# EAGLE board nano_control_station (EAGLE 7.4.0)
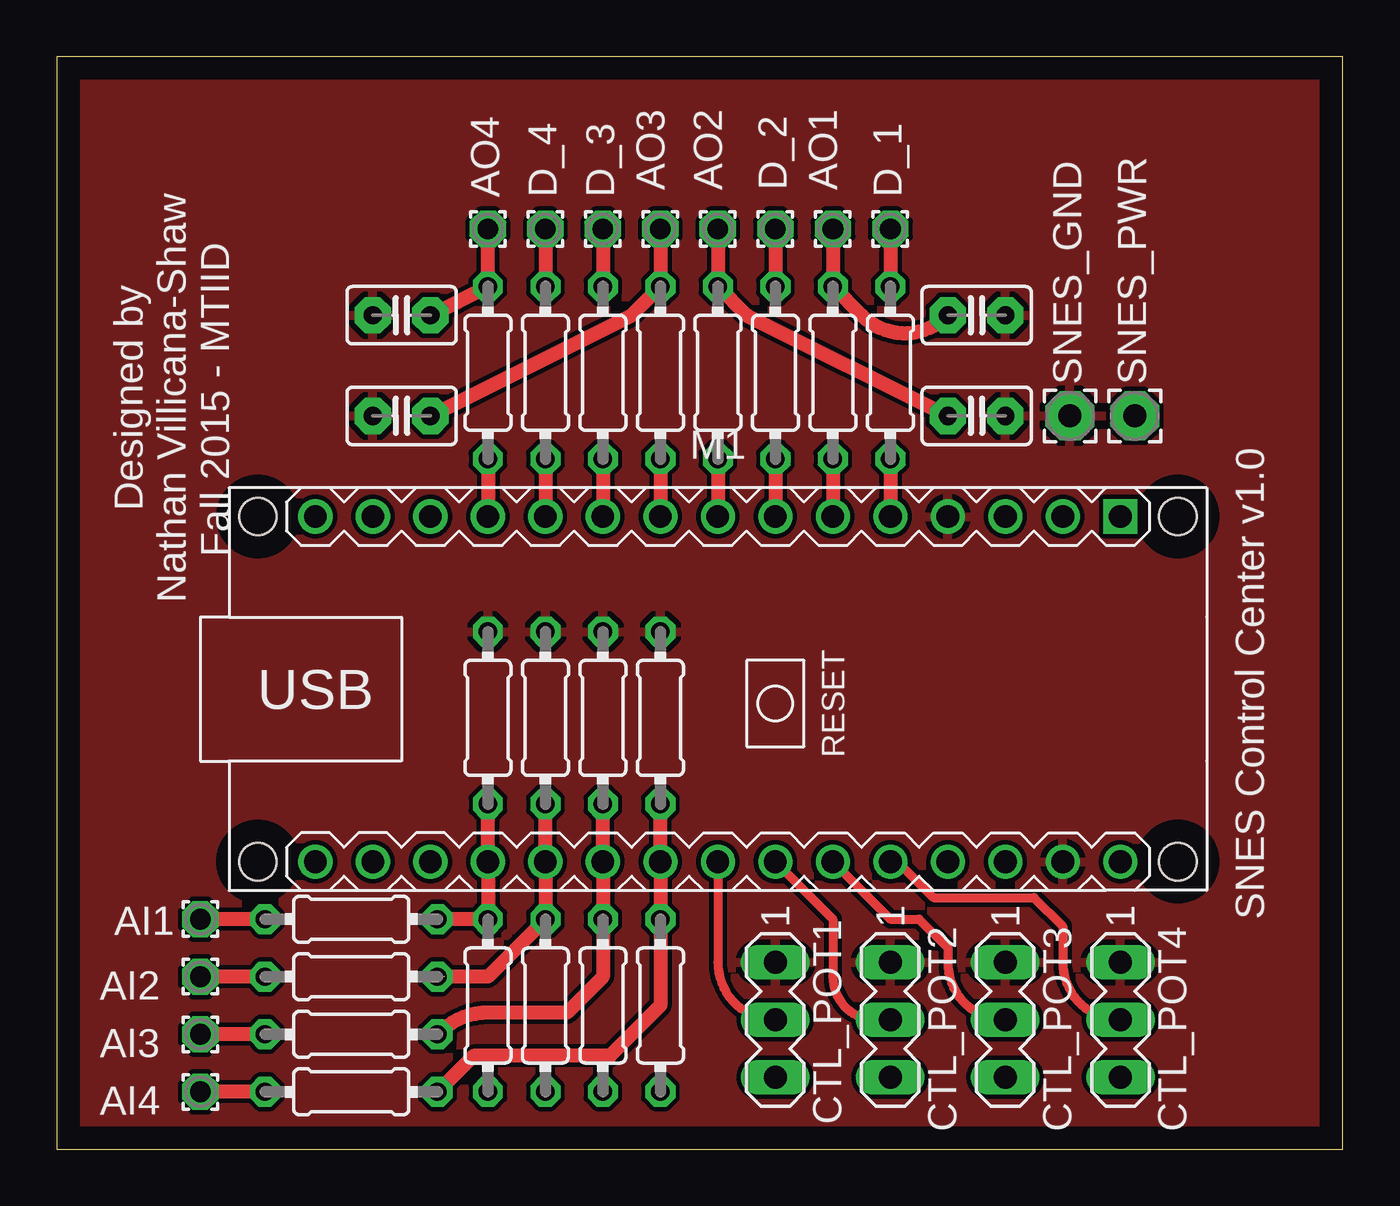
[diagram p0: board, top side]
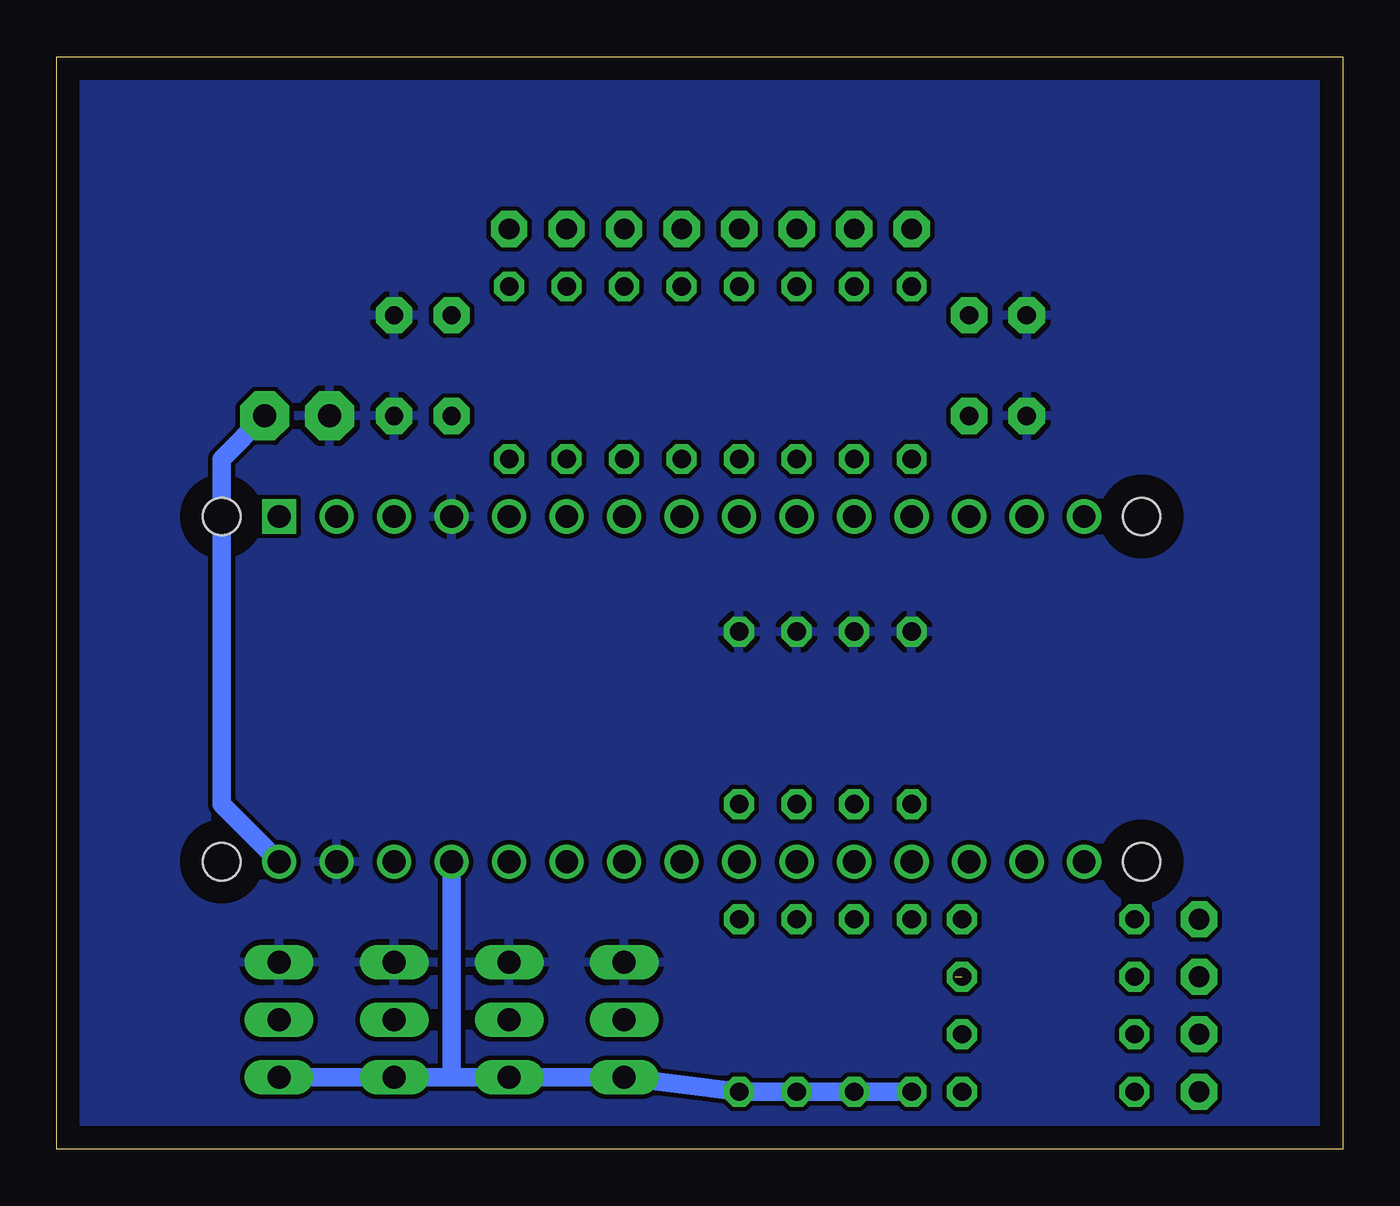
[diagram p1: board, bottom side, seen from below]

Size 56.82 x 48.25 mm. Coordinates in mm from the lower left corner, seen from the top.
Outline: 0,0 56.82,0 56.82,48.25 0,48.25 0,0
Copper layers (1*16): Top 0.035mm / dielectric 1.5mm / Bottom 0.035mm
Design rules "default": minimum track width 10mil, minimum drill 24mil, track to track 8mil, track to pad 8mil, pad to pad 8mil, via to via 8mil, smd to smd 8mil, copper to edge 40mil, drill to drill 8mil, minimum pad ring 10mil, minimum via ring 8mil, stop-mask expansion 4mil, vias tented up to drill 0mil, thermal gap 10mil

## Footprints (pad centres in the part's own frame; a part is rotated, then mirrored left to right if it is on the bottom)
1,6/0,9 = drill 0.914 pad 1.6 octagon: 1 0,0
C2.5-2 = drill 0.813 pad 1.6 octagon: 1 -1.27,0; 2 1.27,0
MA03-1 = drill 1.016 long: 1 -2.54,0; 2 0,0; 3 2.54,0
ARDUINO-NANO-3.0 = drill 1 square: J1.1 17.78,7.62 | drill 1: J1.2 15.24,7.62; J1.3 12.7,7.62; J1.4 10.16,7.62; J1.5 7.62,7.62; J1.6 5.08,7.62; J1.7 2.54,7.62; J1.8 0,7.62; J1.9 -2.54,7.62; J1.10 -5.08,7.62; J1.11 -7.62,7.62; J1.12 -10.16,7.62; J1.13 -12.7,7.62; J1.14 -15.24,7.62; J1.15 -17.78,7.62; J2.1 17.78,-7.62; J2.2 15.24,-7.62; J2.3 12.7,-7.62; J2.4 10.16,-7.62; J2.5 7.62,-7.62; J2.6 5.08,-7.62; J2.7 2.54,-7.62; J2.8 0,-7.62; J2.9 -2.54,-7.62; J2.10 -5.08,-7.62; J2.11 -7.62,-7.62; J2.12 -10.16,-7.62; J2.13 -12.7,-7.62; J2.14 -15.24,-7.62; J2.15 -17.78,-7.62 | hole 1.651: -20.32,7.62; -20.32,-7.62; 20.32,-7.62; 20.32,7.62
0204/7 = drill 0.813 octagon: 1 -3.81,0; 2 3.81,0
2,15/1,0 = drill 1.016 pad 2.159 octagon: 1 0,0

## Placement (x,y rotation side)
AI1  WIREPAD1,6/0,9  [1,6/0,9]  6.35,10.16 90 top
AI2  WIREPAD1,6/0,9  [1,6/0,9]  6.35,7.62 90 top
AI3  WIREPAD1,6/0,9  [1,6/0,9]  6.35,5.08 90 top
AI4  WIREPAD1,6/0,9  [1,6/0,9]  6.35,2.54 0 top
AO1  WIREPAD1,6/0,9  [1,6/0,9]  34.29,40.64 0 top
AO2  WIREPAD1,6/0,9  [1,6/0,9]  29.21,40.64 0 top
AO3  WIREPAD1,6/0,9  [1,6/0,9]  26.67,40.64 0 top
AO4  WIREPAD1,6/0,9  [1,6/0,9]  19.05,40.64 0 top
C1  0.1uf  [C2.5-2]  40.64,36.83 0 top
C2  0.1uf  [C2.5-2]  40.64,32.38 0 top
C3  0.1uf  [C2.5-2]  15.24,32.38 180 top
C4  0.1uf  [C2.5-2]  15.24,36.83 180 top
CTL_POT1  [MA03-1]  31.75,5.71 270 top
CTL_POT2  [MA03-1]  36.83,5.71 270 top
CTL_POT3  [MA03-1]  41.91,5.71 270 top
CTL_POT4  [MA03-1]  46.99,5.71 270 top
D_1  WIREPAD1,6/0,9  [1,6/0,9]  36.83,40.64 0 top
D_2  WIREPAD1,6/0,9  [1,6/0,9]  31.75,40.64 0 top
D_3  WIREPAD1,6/0,9  [1,6/0,9]  24.13,40.64 0 top
D_4  WIREPAD1,6/0,9  [1,6/0,9]  21.59,40.64 0 top
M1  ARDUINO-NANO-3.0  [ARDUINO-NANO-3.0]  29.21,20.32 0 top
R1  3.9k  [0204/7]  34.29,34.29 90 top
R2  3.9k  [0204/7]  29.21,34.29 90 top
R3  3.9k  [0204/7]  26.67,34.29 90 top
R4  3.9k  [0204/7]  19.05,34.29 90 top
R5  200  [0204/7]  13.02,10.16 0 top
R6  60  [0204/7]  19.05,6.35 270 top
R7  90  [0204/7]  19.05,19.05 270 top
R8  200  [0204/7]  13.02,5.08 0 top
R9  60  [0204/7]  24.13,6.35 270 top
R10  90  [0204/7]  24.13,19.05 270 top
R11  200  [0204/7]  13.02,7.62 0 top
R12  60  [0204/7]  21.59,6.35 270 top
R13  90  [0204/7]  21.59,19.05 270 top
R14  200  [0204/7]  13.02,2.54 0 top
R15  60  [0204/7]  26.67,6.35 270 top
R16  90  [0204/7]  26.67,19.05 270 top
R17  15  [0204/7]  36.83,34.29 90 top
R18  15  [0204/7]  31.75,34.29 90 top
R19  15  [0204/7]  24.13,34.29 90 top
R20  15  [0204/7]  21.59,34.29 90 top
SNES_GND  [2,15/1,0]  44.77,32.38 0 top
SNES_PWR  [2,15/1,0]  47.62,32.38 0 top

## Library data of the parts
AI1-AI4 AO1-AO4 D_1-D_4 SNES_GND SNES_PWR = wirepad
C1-C4 = capacitor-wima
CTL_POT1-CTL_POT4 = con-lstb; OC_FARNELL: unknown; OC_NEWARK: unknown
M1 = diy-modules
R1-R20 = rcl

## Nets
3V3: M1.J2.14
5V: CTL_POT1.3 CTL_POT2.3 CTL_POT3.3 CTL_POT4.3 M1.J2.4 R6.2 R9.2 R12.2 R15.2
A0: M1.J2.12 R5.2 R6.1 R7.2
A1: M1.J2.11 R11.2 R12.1 R13.2
A2: M1.J2.10 R8.2 R9.1 R10.2
A3: M1.J2.9 R14.2 R15.1 R16.2
A4: CTL_POT1.2 M1.J2.8
A5: CTL_POT2.2 M1.J2.7
A6: CTL_POT3.2 M1.J2.6
A7: CTL_POT4.2 M1.J2.5
D2_DIGITAL: M1.J1.5 R17.1
D3_PWM: M1.J1.6 R1.1
D4_DIGITAL: M1.J1.7 R18.1
D5_PWM: M1.J1.8 R2.1
D6_PWM: M1.J1.9 R3.1
D7_DIGITAL: M1.J1.10 R19.1
D8_DIGITAL: M1.J1.11 R20.1
D9_PWM: M1.J1.12 R4.1
GND: C1.2 C2.2 C3.2 C4.2 CTL_POT1.1 CTL_POT2.1 CTL_POT3.1 CTL_POT4.1 M1.J1.4 M1.J2.2 R7.1 R10.1 R13.1 R16.1 SNES_GND.1
N$1: AI3.1 R8.1
N$2: AO1.1 C1.1 R1.2
N$3: AO2.1 C2.1 R2.2
N$4: AO3.1 C3.1 R3.2
N$5: AO4.1 C4.1 R4.2
N$6: AI1.1 R5.1
N$7: AI2.1 R11.1
N$8: AI4.1 R14.1
N$9: D_2.1 R18.2
N$10: D_1.1 R17.2
N$11: D_3.1 R19.2
N$12: D_4.1 R20.2
SNES_PWR: M1.J2.1 SNES_PWR.1

## Tracks (layer width: path | path; a pad name or v marks a point on that pad's centre or on a via)
5V
  Bottom 0.813: CTL_POT2.3 CTL_POT1.3 R15.2 R9.2 R12.2 R6.2 | CTL_POT2.3 39.37,3.17 | 39.37,3.17 CTL_POT3.3 | CTL_POT3.3 CTL_POT4.3 | M1.J2.4 39.37,3.17 | CTL_POT2.3 CTL_POT3.3
A0
  Top 0.61: R7.2 M1.J2.12 R6.1 R5.2 16.51,10.16
A1  (1 unrouted)
  Top 0.61: R13.2 M1.J2.11 R12.1 19.05,7.62 17.14,7.62
A2
  Top 0.61: R10.2 M1.J2.10 R9.1 24.13,7.62 22.54,6.03 19.05,6.03 arc46 R8.2
A3
  Top 0.61: R16.2 M1.J2.9 R15.1 26.67,6.35 24.45,4.13 18.41,4.13 R14.2
A4
  Top 0.406: M1.J2.8 29.21,8.26 arc90 CTL_POT1.2
A5
  Top 0.406: M1.J2.7 34.29,10.16 34.29,7.62 arc90 36.2,5.71 CTL_POT2.2
A6
  Top 0.406: M1.J2.6 36.83,10.16 38.1,10.16 39.37,8.89 39.37,8.26 arc90 CTL_POT3.2
A7
  Top 0.406: M1.J2.5 37.15,12.7 38.73,11.11 43.18,11.11 44.45,9.84 44.45,8.26 arc90 CTL_POT4.2
D2_DIGITAL
  Top 0.61: R17.1 M1.J1.5
D3_PWM
  Top 0.61: R1.1 M1.J1.6
D4_DIGITAL
  Top 0.61: R18.1 M1.J1.7
D5_PWM
  Top 0.61: R2.1 M1.J1.8
D6_PWM
  Top 0.61: R3.1 M1.J1.9
D7_DIGITAL
  Top 0.61: R19.1 M1.J1.10
D8_DIGITAL
  Top 0.61: R20.1 M1.J1.11
D9_PWM
  Top 0.61: R4.1 M1.J1.12
GND
  pour Top: 0,0 57.15,0 57.15,48.26 0,48.26
  pour Bottom: 0,48.26 57.15,48.26 57.15,0 0,0
N$1
  Top 0.61: R8.1 AI3.1
N$2
  Top 0.61: AO1.1 R1.2 35.56,36.83 arc90 C1.1
N$3
  Top 0.61: AO2.1 R2.2 30.48,36.83 C2.1
N$4
  Top 0.61: AO3.1 R3.2 25.4,36.83 C3.1
N$5
  Top 0.61: AO4.1 R4.2 C4.1
N$6
  Top 0.61: R5.1 AI1.1
N$7
  Top 0.61: R11.1 AI2.1
N$8
  Top 0.61: R14.1 AI4.1
N$9
  Top 0.61: D_2.1 R18.2
N$10
  Top 0.61: D_1.1 R17.2
N$11
  Top 0.61: D_3.1 R19.2
N$12
  Top 0.61: D_4.1 R20.2
SNES_PWR
  Bottom 0.813: M1.J2.1 49.53,15.24 49.53,30.48 SNES_PWR.1

## Text on the board
tNames: Designed by / Nathan Villicana-Shaw / Fall 2015 - MTIID | SNES Control Center v1.0